# Altium PCB N1202_LCD_module.PcbDoc
Units mm, origin at the board's own origin, x right, y up, seen from the top; angles counter-clockwise.
Board outline 47.04 x 36.37 mm, 2 copper layers (Top Layer, Bottom Layer), stack 1.071 mm thick; 9 components, 11 nets, 40 pads, 50 vias.
Unrouted connection lines stored in the file: 1.
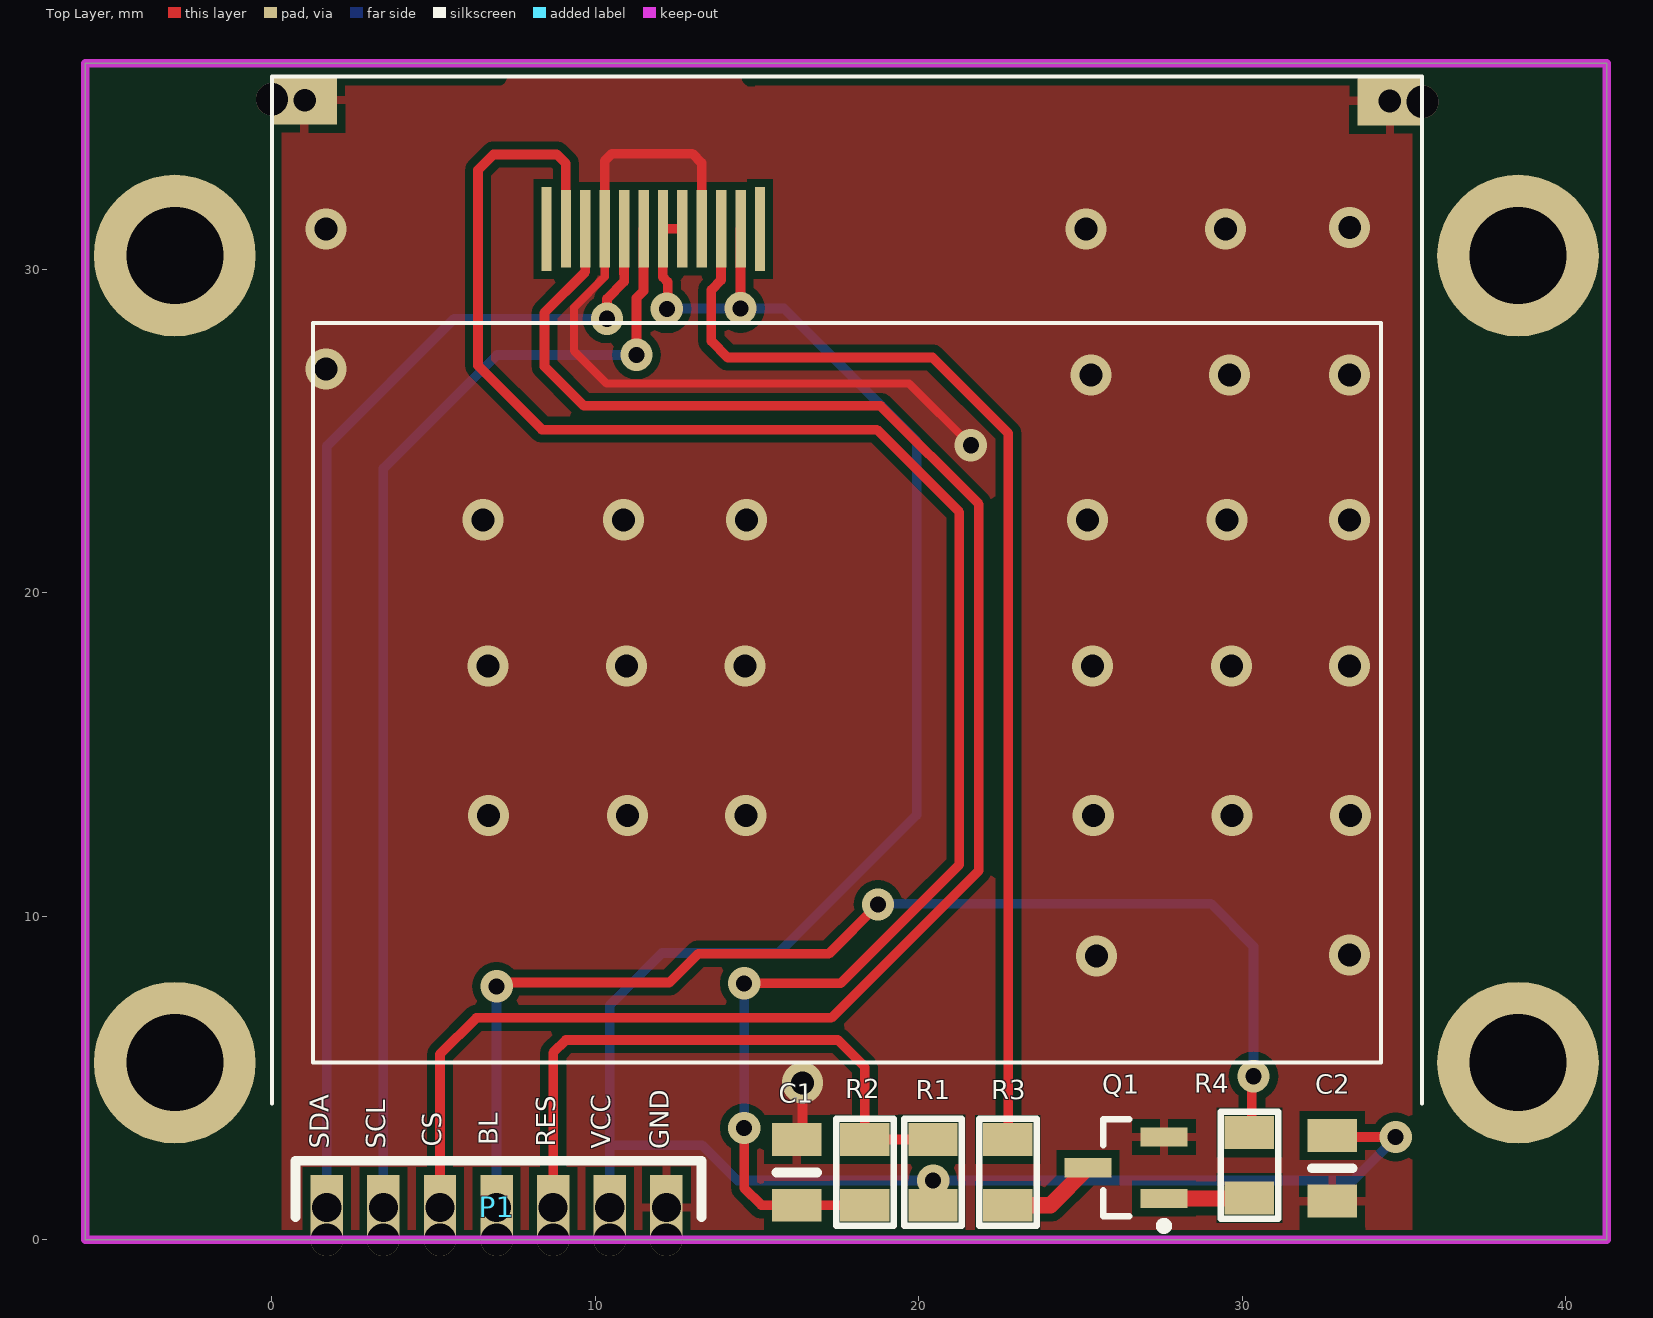
[diagram p0: Top Layer view]
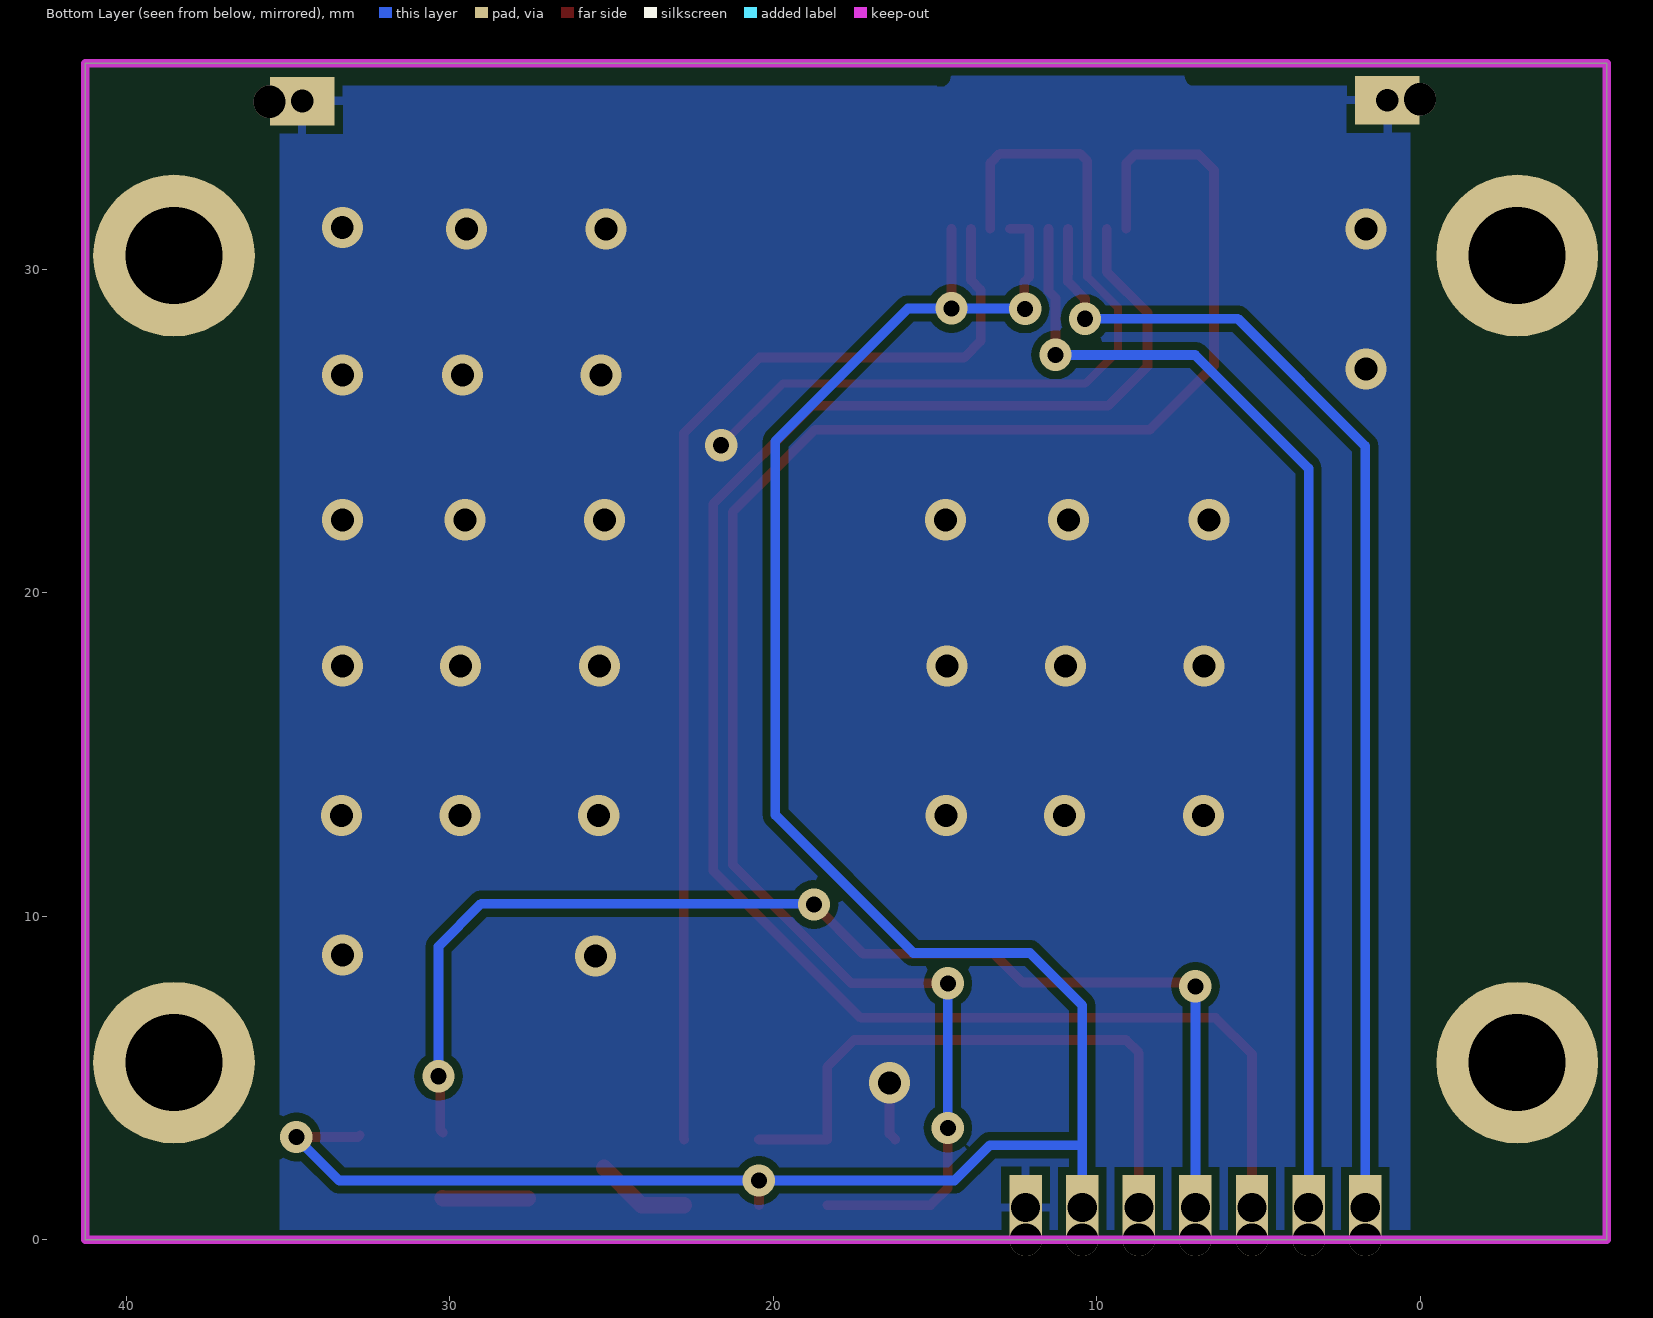
[diagram p1: Bottom Layer view, seen from below]
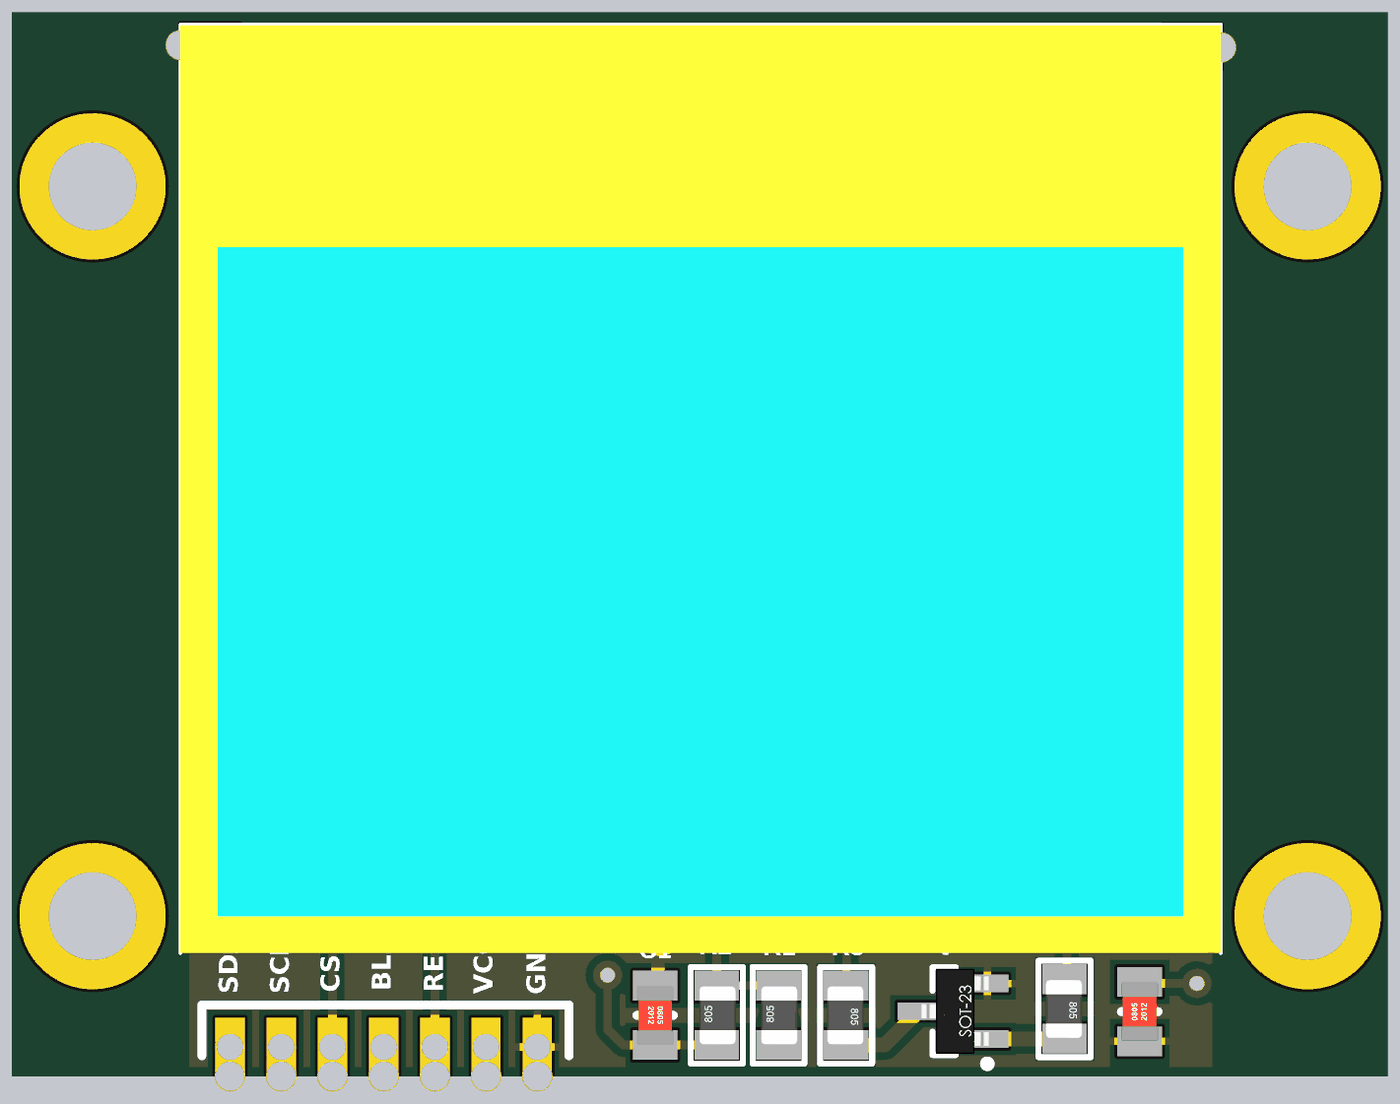
[diagram p2: 3D render of the assembled board from above, using the file's embedded part models]

## Layer stack, top to bottom
Top Solder: solder mask 0.0102, Solder Resist, Dk 3.5
Top Layer: signal copper 0.0356
Dielectric 1: dielectric 1, FR-4, Dk 4.8
Bottom Layer: signal copper 0.0356
Bottom Solder: solder mask 0.0102, Solder Resist, Dk 3.5

## Board outline
-5.766,1.956 -5.766,36.373 41.275,36.373 41.275,0 -5.766,0

## Design rules (kind name [scope] priority, off if disabled: settings)
Clearance [All] p1: gap=0.254 ignorepadtopadclearanceinfootprint=FALSE except(0: Arc-Hole Track-Hole SMDPad-Hole THPad-Hole Via-Hole Fill-Hole Poly-Hole Region-Hole Text-Hole)
PlaneConnect [InNet('GND')] p1: planeconnectstyle=Relief reliefexpansion=0.508 reliefentries=4 reliefconductorwidth=0.254 reliefairgap=0.254
PolygonConnect GND [All vs IsVia and InNet('GND')] p1: connectstyle=Direct reliefconductorwidth=0.254 reliefentries=4 polygonreliefangle="90 Angle" airgapwidth=0.254
PolygonConnect [All] p2: thpad.connectstyle=Relief thpad.reliefconductorwidth=0.254 thpad.reliefentries=4 thpad.polygonreliefangle="90 Angle" thpad.airgapwidth=0.254 smdpad.connectstyle=Relief smdpad.reliefconductorwidth=0.254 smdpad.reliefentries=4 smdpad.polygonreliefangle="90 Angle" smdpad.airgapwidth=0.254 via.connectstyle=Relief via.reliefconductorwidth=0.254 via.reliefentries=4 via.polygonreliefangle="45 Angle" via.airgapwidth=0.254
RoutingVias [All] p1: holewidth=0.5 width=1 viastyle="Through Hole" minholewidth=0.5 minwidth=1 maxholewidth=0.5 maxwidth=1
SolderMaskExpansion [All] p1: expansion=0.102 istentingtop=FALSE
Width [All] p1: maxlimit=0.5 minlimit=0.254 preferedwidth=0.3
29 further rules are at their usual default settings.

## Classes and differential pairs
component class "LCD1202_SMD module": C1 C2 P1 Q1 R1 R2 R3 R4

## Components (designator, comment, footprint, x,y, rotation, side; value= is the part's Value field where it differs from the comment)
C1 "10UF" SMD-0805C 16.231,2.083 r180 top
C2 "100nf" SMD-0805C 32.791,2.21 r0 top
LCD1 "NOKIA1202LCD" "LCD 1202 right" 0.007,4.218 r0 top
P1 "LCD PINOUT'" "SMD SOLDER CONNECTOR X7" 1.702,0 r0 top
Q1 "BC817-25" SOT23_BEC_M 26.409,2.225 r180 top
R1 "10R" SMD-0805-RES 20.447,2.083 r0 top
R2 "1K" SMD-0805-RES 18.339,2.083 r0 top
R3 "100R" SMD-0805-RES 22.758,2.083 r180 top
R4 "1K" SMD-0805-RES 30.226,2.301 r180 top

## Footprints (in the part's own frame and the unit in brackets; to place one, negate y for a bottom-side part, rotate by r counter-clockwise, add the part's x,y. Pads: shape width x height; smd on the part's side, far side on the other; paste and mask are expansions set on the pad)
"LCD 1202 right" [mm]
  rect 0.32x2.6 smd: 0(8.49,27.032) 11(15.09,27.032)
  rect 0.32x2.4 smd: 1(9.09,27.032) 2(9.69,27.032) 3(10.29,27.032) 4(10.89,27.032) 5(11.49,27.032) 6(12.09,27.032) 7(12.69,27.032) 8(13.29,27.032) 9(13.89,27.032) 10(14.49,27.032)
  silkscreen extent 0,0 35.56,31.75, body extent 0,-0.01 35.56,31.72, height 3
"SMD SOLDER CONNECTOR X7" [mm]
  rect 1x2 hole 0.9: 1(0,1) 2(1.75,1) 3(3.5,1) 4(5.25,1) 5(7,1) 6(8.75,1) 7(10.5,1)
  silkscreen extent -0.97,0.7 11.58,2.44
SMD-0805-RES [mil]
  rect 60x40 smd: 1(0,40) 2(0,-40)
  silkscreen extent -35,-65 35,65, body extent -24,-39 26,39, height 31
SMD-0805C [mil]
  rect 60x40 smd: 1(0,40) 2(0,-40)
  silkscreen extent -25,0 25,0, body extent -25,-39 25,39, height 35
SOT23_BEC_M [mm]
  rect 1.45x0.6 smd: 1(-1.175,0.95) 2(-1.175,-0.95) 3(1.175,0)
  silkscreen extent -1.3,-1.5 0.7,1.92, body extent -1.23,-1.45 1.07,1.45, height 1

## Part data
C1 C2: library part GC321AD72E103KX01D, "CAP CER 10000PF 250V X7T 0805"
LCD1: library part LCD1202-EXT
P1: library part "Header 7", "Header, 7-Pin"
Q1: "NPN General Purpose Amplifier"
R1 R2 R3 R4: library part ERJ-6BQF1R0V, "RES SMD 1 OHM 1% 1/3W 0805"

## Free pads (board coordinates)
  rect 2x1.5 hole 0.7: 2(34.569,35.204) 3(1.016,35.23)
  round 5 hole 3: 4(-2.997,5.475) 5(-2.997,30.426) 6(38.532,30.426) 7(38.532,5.475)

## Via types
v1: diameter 1.27, hole 0.711, Top Layer to Bottom Layer, 28 vias
v2: diameter 1, hole 0.5, Top Layer to Bottom Layer, tented both sides, 12 vias
v3: diameter 1, hole 1, Top Layer to Bottom Layer, tented both sides, 9 vias
v4: diameter 1.27, hole 0.7, Top Layer to Bottom Layer, 1 vias

## Nets (pads, with @x,y where several pads share a name; then routed paths per layer and width w, separated by ;. In a path a pad name is that pad's centre, name@x,y a point inside that pad or via, vN(x,y) a via of type N, cw(c..) or ccw(c..) an arc to the next point about the centre after c; other vN are vias at no path point)
3.3V: C2.1 P1.6 R1.2 | length 73.5
  Top Layer w0.3: v2(12.217,28.778) 12.243,28.804 12.243,29.616 12.093,29.766 12.093,31.254 12.693,31.254 ; v2(14.493,28.793) 14.493,31.254 ; R1.2 v2(20.447,1.829) ; C2.1 32.842,3.175 v2(34.747,3.175)
  Bottom Layer w0.3: P1.6 10.452,2.896 ; v2(12.217,28.778) 11.942,28.778 11.927,28.793 v2(14.493,28.793) 15.835,28.793 19.939,24.689 19.939,13.132 15.672,8.865 12.065,8.865 10.452,7.251 10.452,2.896 ; v2(34.747,3.175) 34.773,3.175 33.426,1.829 v2(20.447,1.829) 14.402,1.829 13.31,2.921 10.477,2.921 10.452,2.896
  other v3: 10.452,0
GND: C1.2 C2.2 P1.7 pad.2 pad.3 Q1.2 | length 26.8
  Top Layer w0.254: 10.293,31.254 10.293,29.772 9.347,28.826 9.347,27.483 10.355,26.475 19.702,26.475 v2(21.615,24.562)
  Top Layer w0.3: 10.293,31.254 10.293,33.356 10.516,33.579 13.005,33.579 13.293,33.291 13.293,31.254 ; C1.2 16.408,3.277 v1(16.408,4.851)
  other v1: 25.502,8.771 33.325,8.797 6.706,13.115 10.998,13.115 14.656,13.115 25.4,13.115 29.693,13.115 33.35,13.115 6.68,17.738 10.973,17.738 14.63,17.738 25.375,17.738 29.667,17.738 33.325,17.738 6.528,22.259 10.871,22.259 14.681,22.259 25.222,22.259 29.54,22.259 33.325,22.259 25.324,26.729 29.616,26.729 33.325,26.729 1.676,26.924 1.676,31.254 25.171,31.25 29.489,31.25
  other v3: 12.202,0
  other v4: 33.325,31.293
LCD_BACKLIGHT: P1.4 R4.2 | length 37.9
  Top Layer w0.3: v2(6.952,7.831) 6.833,7.95 12.294,7.95 13.183,8.839 17.221,8.839 v2(18.745,10.363) ; R4.2 30.302,3.393 30.302,5.004 v2(30.353,5.055)
  Bottom Layer w0.3: P1.4 v2(6.952,7.831) ; v2(18.745,10.363) 18.745,10.389 29.032,10.389 30.353,9.068 v2(30.353,5.055)
  other v3: 6.952,0
LCD_CS: P1.3 | length 55
  Top Layer w0.3: P1.3 5.202,5.735 6.325,6.858 17.302,6.858 21.86,11.416 21.86,22.743 18.821,25.781 9.652,25.781 8.433,27 8.433,28.663 9.693,29.923 9.693,31.254
  other v3: 5.202,0
LCD_RESET: P1.5 R1.1 R2.1 | length 19.3
  Top Layer w0.3: P1.5 8.702,5.781 9.093,6.172 17.501,6.172 18.339,5.334 R2.1 R1.1
  other v3: 8.702,0
LCD_SCLK: P1.2 | length 36.1
  Top Layer w0.3: v2(11.278,27.356) 11.278,29.117 11.493,29.332 11.493,31.254
  Bottom Layer w0.3: P1.2 3.452,23.848 6.96,27.356 v2(11.278,27.356)
  other v3: 3.452,0
LCD_SI:  | length 38.2
  Top Layer w0.3: v2(10.363,28.473) 10.363,29.091 10.897,29.625 10.897,29.87 10.897,31.25 10.893,31.254 10.893,29.87
  Bottom Layer w0.3: 1.702,1 1.702,24.536 5.639,28.473 v2(10.363,28.473)
  other v3: 1.702,0
NetC1_1: C1.1 R2.2 | length 57.2
  Top Layer w0.3: 9.093,31.254 9.093,33.274 8.814,33.553 6.858,33.553 6.375,33.071 6.375,27.026 8.357,25.044 18.709,25.044 21.26,22.494 21.26,11.599 17.585,7.925 v2(14.605,7.925) ; v2(14.605,3.454) 14.605,1.6 15.138,1.067 C1.1 R2.2
  Bottom Layer w0.3: v2(14.605,3.454) v2(14.605,7.925)
NetLCD1_9: R3.2 | length 35.8
  Top Layer w0.3: 13.893,31.254 13.893,29.666 13.589,29.362 13.589,27.783 14.097,27.275 20.426,27.275 22.773,24.928 22.773,3.114 R3.2
NetQ1_1: Q1.1 R4.1 | length 2.6
  Top Layer w0.5: Q1.1 30.216,1.275 R4.1
NetQ1_3: Q1.3 R3.1 | length 3
  Top Layer w0.5: R3.1 24.076,1.067 Q1.3
pads on no net: LCD1.0 LCD1.1 LCD1.2 LCD1.3 LCD1.4 LCD1.5 LCD1.6 LCD1.7 LCD1.8 LCD1.9 LCD1.10 LCD1.11 P1.1
copper on no net:
  other v3: 35.576,35.179 0.009,35.255

## Polygon pours and split planes (outlines as drawn)
GND on Bottom Layer "Bottom Layer-GND" (solid, pour order 34): 35.576,35.981 0,35.981 0,0.152 35.475,0.152 35.576,0.051
GND on Top Layer "Top Layer-GND" (solid, pour order 36): 35.576,35.981 35.576,0 35.322,0.254 0,0.254 0,35.981

## Keep-outs
Keep-Out Layer:
  the board outline again, w0.254

## Silkscreen, mask and mechanical layers (free items; w line width, h text height)
Top Overlay:
  text "BL" at 7.188,2.925 h1 r90
  text "CS" at 5.436,2.87 h1 r90
  text "RES" at 8.966,2.87 h1 r90
  text "SDA" at 1.956,2.819 h1 r90
  text "SCL" at 3.708,2.819 h1 r90
  text "VCC" at 10.668,2.819 h1 r90
  text "GND" at 12.471,2.794 h1 r90

## Text inside footprints (layer, text, board x,y; h text height)
P1: Mechanical 15 "PCB edge" at 5.309,-1.118 h1